# EAGLE board 1000xopamp (EAGLE 5.11)
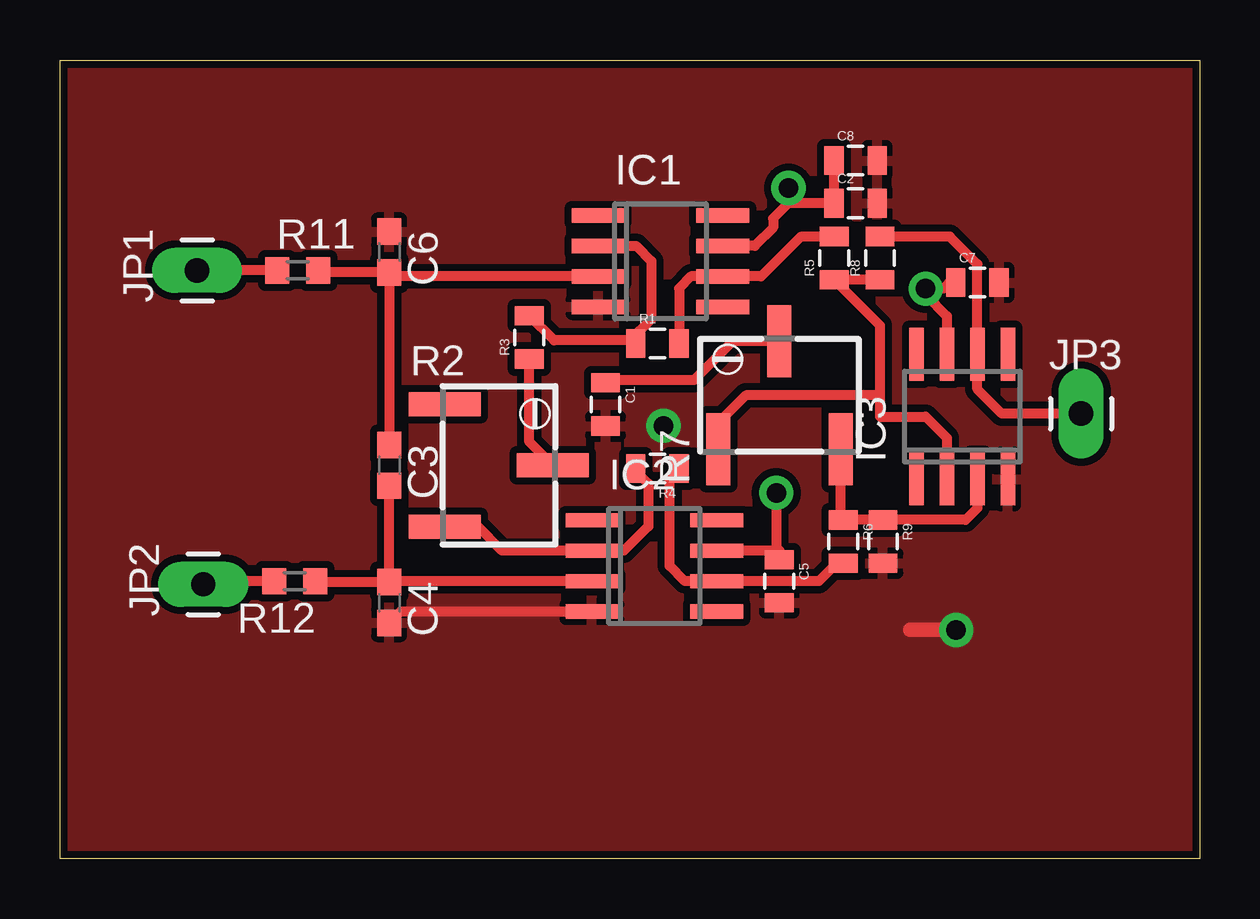
[diagram p0: board, top side]
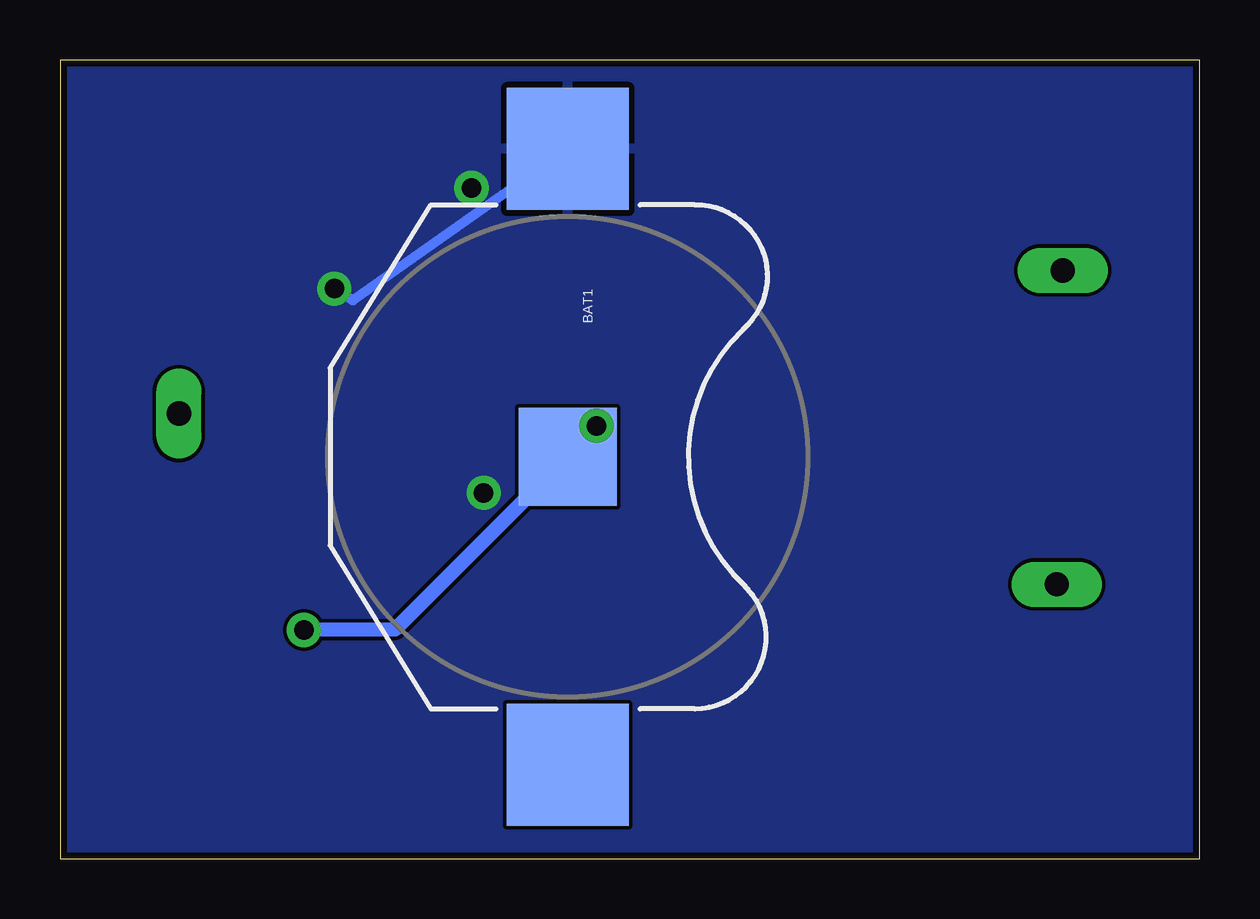
[diagram p1: board, bottom side, seen from below]

Size 47.5 x 33.27 mm. Coordinates in mm from the lower left corner, seen from the top.
Outline: 47.5,33.27 47.5,0 0,0 0,33.27 47.5,33.27
Copper layers (1*16): Top 0.035mm / dielectric 1.5mm / Bottom 0.035mm
Design rules "ITead_rule": minimum track width 6mil, minimum drill 12mil, track to track 6mil, track to pad 6mil, pad to pad 6mil, via to via 6mil, smd to smd 0mil, copper to edge 10mil, drill to drill 10mil, minimum pad ring 10mil, minimum via ring 6mil, stop-mask expansion 2mil, vias tented up to drill 100mil, thermal gap 10mil

## Footprints (pad centres in the part's own frame; a part is rotated, then mirrored left to right if it is on the bottom)
BATTCON_20MM = smd 5.08 x 5.08: 1 -12.827,0; 3 12.827,0 | smd 4.064 x 4.064: 2 0,0
0805 = smd 0.8 x 1.2: 1 -0.9,0; 2 0.9,0
C0603 = smd 1.1 x 1: 1 -0.85,0; 2 0.85,0
SO08 = smd 0.6 x 2.2: 1 -1.905,-2.6; 2 -0.635,-2.6; 3 0.635,-2.6; 4 1.905,-2.6; 5 1.905,2.6; 6 0.635,2.6; 7 -0.635,2.6; 8 -1.905,2.6
1X01_LONGPAD = drill 1.016 pad 1.88 long: 1 0,0
RTRIMTS63Y = smd 1 x 3: 1 -2.55,-2.25; 2 0,2.25; 3 2.55,-2.25
R0603 = smd 1 x 1.1: 1 -0.85,0; 2 0.85,0

## Placement (x,y rotation side)
BAT1  [BATTCON_20MM]  26.34,16.74 270 bottom
C1  [0805]  22.73,18.92 270 top
C2  .1uF  [0805]  33.15,27.3 0 top
C3  200 pF  [C0603]  13.72,16.38 270 top
C4  20 pF  [C0603]  13.72,10.67 270 top
C5  .1uF  [0805]  29.97,11.56 270 top
C6  20 pF  [C0603]  13.72,25.27 270 top
C7  .1uF  [0805]  38.23,24 0 top
C8  10uF  [0805]  33.15,29.08 0 top
IC1  OP37  [SO08]  25.02,24.89 270 top
IC2  OP37  [SO08]  24.76,12.19 270 top
IC3  OP37  [SO08]  37.59,18.41 0 top
JP1  M01PTH_LONGPAD  [1X01_LONGPAD]  5.71,24.51 90 top
JP2  M01PTH_LONGPAD  [1X01_LONGPAD]  5.97,11.43 90 top
JP3  M01PTH_LONGPAD  [1X01_LONGPAD]  42.54,18.54 0 top
R1  5k .01%  [0805]  24.89,21.46 0 top
R2  100R  [RTRIMTS63Y]  18.29,16.38 270 top
R3  390  [0805]  19.56,21.72 90 top
R4  5k .01%  [0805]  24.89,16.26 180 top
R5  500 .1%  [0805]  32.26,25.02 90 top
R6  500 .1%  [0805]  32.64,13.21 270 top
R7  100k  [RTRIMTS63Y]  29.97,19.3 0 top
R8  20k .1%  [0805]  34.16,25.02 90 top
R9  20k .1%  [0805]  34.29,13.21 270 top
R11  100 kOhm  [R0603]  9.91,24.51 0 top
R12  100 kOhm  [R0603]  9.78,11.56 180 top

## Library data of the parts
BAT1 C1 JP1-JP3 = SparkFun
C2 C5 C7 C8 = 8x8
C3 C4 C6 R11 R12 = resistor
IC1-IC3 = 1000xopamp
R1 R3-R6 R8 R9 = TVbNull-Laser
R2 R7 = rcl

## Nets
GND: BAT1.2 C1.2 C2.2 C4.2 C5.2 C6.1 C7.2 C8.2 IC1.4 IC2.4 IC3.4 R9.2
INPUT+: C3.2 C4.1 IC2.3 R12.1
INPUT-: C3.1 C6.2 IC1.3 R11.2
N$1: IC1.2 R1.1 R3.2
N$2: IC2.2 R2.3 R4.2
N$3: R2.2 R3.1
N$4: IC2.6 R4.1 R6.2
N$5: IC1.6 R1.2 R5.2
N$6: IC3.2 R5.1 R7.1 R8.1
N$7: IC3.3 R6.1 R7.3 R9.1
N$8: C1.1 R7.2
N$9: JP2.1 R12.2
N$10: IC3.6 JP3.1 R8.2
N$12: JP1.1 R11.1
VCC: BAT1.1 C2.1 C5.1 C7.1 C8.1 IC1.7 IC2.7 IC3.7

## Tracks (layer width: path | path; a pad name or v marks a point on that pad's centre or on a via)
GND  (via drill 0.81 pad 1.42)
  Top 0.406: C4.2 14.18,10.29 IC2.4
  Top 0.61: v37.34,9.52 35.43,9.52
  Bottom 0.406: v25.15,18.03 26.22,17.84 BAT1.2
  Bottom 0.61: BAT1.2 33.53,9.56 v37.34,9.52
  pour Top (isolate 0.305): -0.64,34.16 48.51,34.42 48.39,0.38 -0.76,0.13
INPUT+
  Top 0.406: C4.1 13.75,11.56 IC2.3 | C4.1 C3.2 | R12.1 10.67,11.52 C4.1
INPUT-
  Top 0.406: C6.2 C3.1 | R11.2 10.84,24.42 C6.2 | C6.2 13.88,24.26 IC1.3
N$1
  Top 0.406: IC1.2 24,25.53 24.64,24.89 24.64,22.48 23.75,21.59 | 23.75,21.59 23.99,21.59 | R3.2 20.58,21.59 23.75,21.59 | 23.99,21.59 24,21.59 | 23.99,21.59 R1.1
N$2
  Top 0.406: R4.2 23.99,16.14 24.51,15.62 24.51,13.84 23.49,12.83 IC2.2 18.41,12.83 17.4,13.84 R2.3
N$3
  Top 0.406: R2.2 19.56,17.36 R3.1
N$4
  Top 0.406: R4.1 25.79,16.14 25.4,15.75 25.4,12.19 26.03,11.56 IC2.6 31.62,11.56 32.37,12.31 R6.2
N$5
  Top 0.406: R1.2 25.79,23.76 26.29,24.26 IC1.6 29.21,24.26 30.86,25.91 32.25,25.91 R5.2
N$6
  Top 0.406: IC3.2 36.96,17.53 36.07,18.41 34.16,18.41 34.16,19.3 | R8.1 R5.1 34.16,22.21 34.16,19.3 | R7.1 27.43,18.16 28.57,19.3 34.16,19.3
N$7
  Top 0.406: IC3.3 38.23,14.6 37.73,14.11 R9.1 R6.1 32.52,14.11 R7.3
N$8
  Top 0.406: C1.1 22.85,19.94 26.42,19.94 28.03,21.55 R7.2
N$9
  Top 0.406: JP2.1 6.1,11.56 R12.2
N$10
  Top 0.406: JP3.1 39.24,18.54 38.23,19.56 IC3.6 38.23,24.77 37.07,25.92 R8.2
N$12
  Top 0.406: R11.1 JP1.1
VCC  (via drill 0.81 pad 1.42)
  Top 0.406: IC3.7 36.96,22.61 36.07,23.49 v36.07,23.75 36.82,23.75 37.2,24.13 C7.1 | IC1.7 28.96,25.53 29.72,26.29 29.72,26.67 30.35,27.3 | 29.84,12.83 IC2.7 | C5.1 29.97,12.83 29.84,12.83 | v29.84,15.24 29.84,12.83 | 30.35,27.3 C2.1 C8.1 | 30.35,27.3 v30.35,27.94
  Bottom 0.406: v36.07,23.75 35.29,23.26 BAT1.1
  pour Bottom: -1.52,34.16 49.28,34.04 49.15,0 -1.65,0.13